# Allegro board ECG_v2.brd
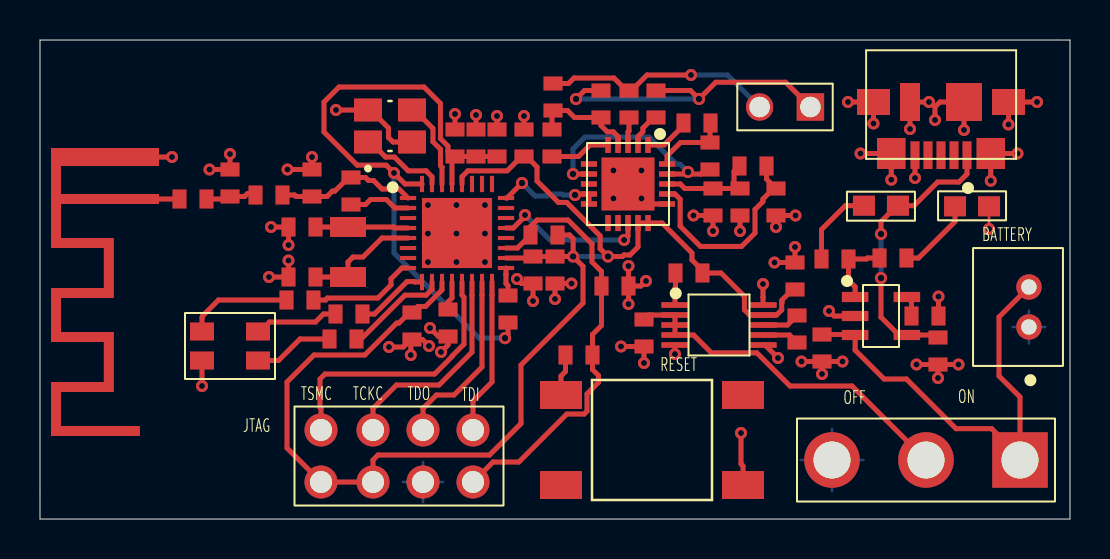
[diagram p0: board, top side]
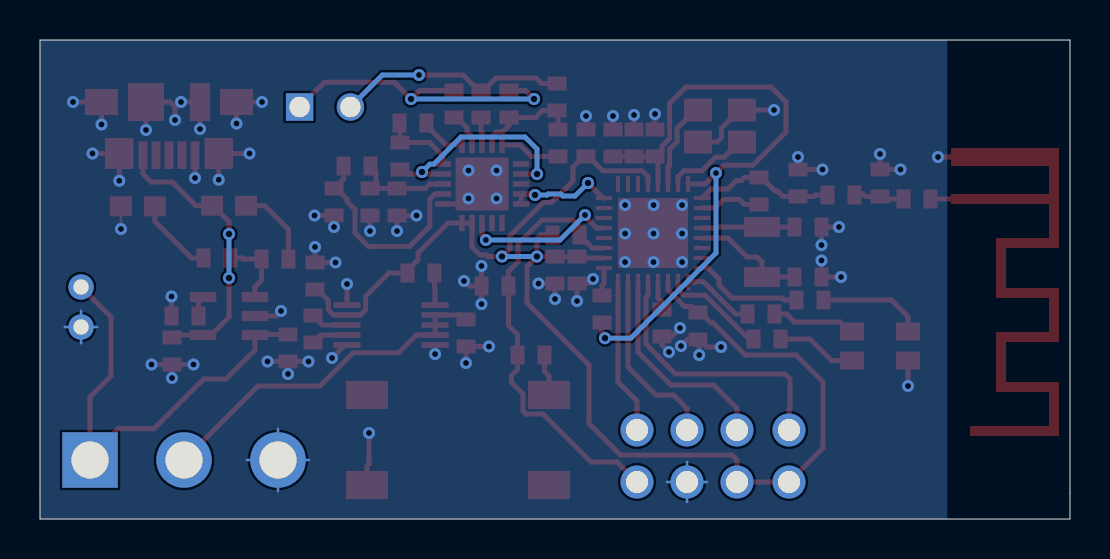
[diagram p1: board, bottom side, seen from below]

Outline 51.5 x 23.95 mm; copper layers: TOP, BOTTOM. Coordinates in mm from the lower left corner of the outline.
Outline path: 0,23.95 51.5,23.95 51.5,0 0,0 0,23.95

## Design rules (mm)
constraint set DEFAULT: min track width 0.127

## Placement (name value [footprint] x y rotation side)
A1  ANTENNA  [AN043_PATCH_ANTENNA]  5.45 19.05 90 top
C1  100nF  [0603_C]  28.75 11.65 0 top
C2  12 pF  [0603_C]  13.1 14.6 0 top
C3  12 pF  [0603_C]  13.1 12.1 0 top
C4  12 pF  [0603_C]  7.65 16 0 top
C5  1.2 pF  [0603_C]  13.6 16.8 270 top
C6  1.2 pF  [0603_C]  9.5 16.8 270 top
C7  1 uF  [0603_C]  20.4 9.8 90 top
C8  100 nF  [0603_C]  18.6 9.65 90 top
C9  100 nF  [0603_C]  24.2 18.8 270 top
C10  10 uF  [0603_C]  24.65 12.45 90 top
C11  100 nF  [0603_C]  25.75 12.45 90 top
C12  10 uF  [0603_C]  21.8 18.8 270 top
C13  100 nF  [0603_C]  22.85 18.8 270 top
C14  100 nF  [0603_C]  20.75 18.8 270 top
C15  0.33 uF  [0603_C]  37.85 9.5 90 top
C16  10uF  [0603_C]  37.75 12.15 90 top
C17  10 uF  [0603_C]  30.2 9.3 90 top
C18  4.7uF  [0603_C]  44.9 8.4 90 top
C19  4.7uF  [0603_C]  39.1 8.55 90 top
C20  0.22uF  [0603_C]  32.85 19.8 180 top
C21  1nF  [0603_C]  25.6 18.8 90 top
C22  0.1uF  [0603_C]  36.8 15.85 270 top
C23  0.1uF  [0603_C]  33.65 15.85 270 top
CN1  3-644456-2  [TE_3-644456-2]  38.52 20.6 180 top
CN2  B2B-PH-K-S  [CONN2]  49.45 9.6 270 top
D1  RGB  [RGB_LED]  9.5 8.65 0 top
D2  LTST-S270KGKT  [LED_SMD]  46.6 15.63 180 top
D3  LTST-S270KGKT  [LED_SMD]  42.05 15.67 0 top
J1  4X2  [HEADER4X2]  17.95 3.15 180 top
J2  47346-0001  [MICRO_USB]  45.05 20.85 180 top
L1  15 nH  [0603_L]  15.55 16.4 90 top
L2  2 nH  [0603_L]  11.45 16.2 180 top
L3  10 uH  [0603_L]  23.4 10.5 270 top
R1  100  [0603_R]  15.15 9 180 top
R2  100  [0603_R]  15.45 10.25 180 top
R3  270  [0603_R]  13 10.95 180 top
R4  10k  [0603_R]  25.2 14.2 180 top
R5  330  [0603_R]  26.95 8.2 180 top
R6  100 k  [0603_R]  32.45 12.3 180 top
R7  8.2k  [0603_R]  44.25 10.15 180 top
R8  150  [0603_R]  39.75 13 180 top
R9  150  [0603_R]  42.65 13.05 180 top
R10  180k  [0603_R]  30.8 20.75 90 top
R11  10M  [0603_R]  33.5 18.15 270 top
R12  180k  [0603_R]  29.45 20.75 270 top
R13  10M  [0603_R]  28.05 20.75 270 top
R14  10M  [0603_R]  25.65 21.1 270 top
R15  10M  [0603_R]  35.65 17.65 180 top
R16  10M  [0603_R]  35 15.85 270 top
S1  SPDT  [SPDT_SW]  44.3 2.95 180 top
S2  FSM2JSMA  [BUTTON_SMD]  30.6 3.95 0 top
U1  CC2640R2LRHBR  [CC2640]  20.85 14.3 0 top
U2  MAX1759EUB  [MAX1759]  33.95 9.7 0 top
U3  -  [MCP73831]  42.05 10.15 0 top
U4  -  [AD8232]  29.4 16.75 0 top
Y1  TSX-3225_240000MF20X-AC0  [XTAL_24MHZ]  17.5 19.65 90 top
Y2  FC-135R_327680KA-AG0  [XTAL_32_768KHZ]  15.4 13.35 270 top

## Library data of the parts
A1 = ANTENNA_1
C1 C15-C23 = C
C2-C14 = Capacitor
CN1 CN2 = 3-644456-2
D1 = XZM2CRKM2DGFBB45SCCB
D2 D3 = LTST-S270KGKT
J1 = 5X5
J2 = 47346-0001
L1-L3 = Inductor
R1-R16 = R
S1 = 500SSP1S1M2REA
S2 = 2-1437565-7
U1 = CC2640R2LRHBR
U2 = MAX1759EUB
U3 = MCP73831T-2ACIOT
U4 = AD8232ACPZ-WP: User Part Number: PN
Y1 = TSX-3225_240000MF20X-AC0
Y2 = FC-135R_327680KA-AG0

## Footprints (pads in the part's own frame, mm; a bottom-side part is the same pattern mirrored in y, then rotated)
0603_C
  rect 0.7x0.95 smd: 1(-0.675,0) 2(0.675,0)
0603_L
  rect 0.7x0.95 smd: 1(-0.675,0) 2(0.675,0)
0603_R
  rect 0.7x0.95 smd: 1(-0.675,0) 2(0.675,0)
AD8232
  rect 0.275x0.805 smd: 1(1,1.952) 2(0.5,1.952) 3(0,1.952) 4(-0.5,1.952) 5(-1,1.952) 11(-1,-1.952) 12(-0.5,-1.952) 13(0,-1.952) 14(0.5,-1.952) 15(1,-1.952)
  rect 0.805x0.275 smd: 6(-1.952,1) 7(-1.952,0.5) 8(-1.952,0) 9(-1.952,-0.5) 10(-1.952,-1) 16(1.952,-1) 17(1.952,-0.5) 18(1.952,0) 19(1.952,0.5) 20(1.952,1)
  rect 2.65x2.65 smd: HTAB(0,0)
AN043_PATCH_ANTENNA
  rect 0.9x0.5 smd: 1(-0.95,-0.25)
  rect 0.5x0.5 smd: 2(-3.05,-0.25)
BUTTON_SMD
  rect 2.1x1.4 smd: 1(-4.55,2.25) 2(4.55,2.25) 3(-4.55,-2.25) 4(4.55,-2.25)
CC2640
  rect 0.813x0.203 smd: 1(-2.451,1.75) 2(-2.451,1.25) 3(-2.451,0.75) 4(-2.451,0.25) 5(-2.451,-0.25) 6(-2.451,-0.75) 7(-2.451,-1.25) 8(-2.451,-1.75) 17(2.451,-1.75) 18(2.451,-1.25) 19(2.451,-0.75) 20(2.451,-0.25) 21(2.451,0.25) 22(2.451,0.75) 23(2.451,1.25) 24(2.451,1.75)
  rect 0.203x0.813 smd: 9(-1.75,-2.451) 10(-1.25,-2.451) 11(-0.75,-2.451) 12(-0.25,-2.451) 13(0.25,-2.451) 14(0.75,-2.451) 15(1.25,-2.451) 16(1.75,-2.451) 25(1.75,2.451) 26(1.25,2.451) 27(0.75,2.451) 28(0.25,2.451) 29(-0.25,2.451) 30(-0.75,2.451) 31(-1.25,2.451) 32(-1.75,2.451)
  rect 3.505x3.505 smd: 33(0,0)
CONN2
  round 1.27 hole 0.762: 1(0,0) 2(-2,0)
HEADER4X2
  round 1.65 hole 1.1: 1(-3.7,-1.3) 2(-3.7,1.3) 3(-1.2,-1.3) 4(-1.2,1.3) 5(1.3,-1.3) 6(1.3,1.3) 7(3.9,-1.3) 8(3.9,1.3)
LED_SMD
  rect 1.1x1 smd: 1(-0.85,0) 2(0.85,0)
MAX1759
  rect 1.359x0.279 smd: 1(-2.203,1) 2(-2.203,0.5) 3(-2.203,0) 4(-2.203,-0.5) 5(-2.203,-1) 6(2.203,-1) 7(2.203,-0.5) 8(2.203,0) 9(2.203,0.5) 10(2.203,1)
MCP73831
  rect 1.321x0.508 smd: 1(-1.295,0.95) 2(-1.295,0) 3(-1.295,-0.95) 4(1.295,-0.95) 5(1.295,0.95)
MICRO_USB
  rect 0.45x1.38 smd: 1(-1.3,2.66) 2(-0.65,2.66) 3(0,2.66) 4(0.65,2.66) 5(1.3,2.66)
  rect 1.425x1.55 smd: S1(-2.487,2.575) S2(2.487,2.575)
  rect 1.65x1.3 smd: S3(-3.375,0) S6(3.375,0)
  rect 1.8x1.9 smd: S4(-1.15,0)
  rect 1x1.9 smd: S5(1.55,0)
RGB_LED
  rect 1.2x0.9 smd: 1(-1.4,0.725) 2(1.4,0.725) 3(1.4,-0.725) 4(-1.4,-0.725)
SPDT_SW
  rect 2.775x2.775 hole 1.85: 1(-4.7,0)
  round 2.775 hole 1.85: 2(0,0) 3(4.7,0)
TE_3-644456-2
  rect 1.37x1.37 hole 1.02: 1(0,0)
  round 1.37 hole 1.02: 2(2.54,0)
XTAL_24MHZ
  rect 1.15x1.4 smd: 1(-0.8,1.1) 2(-0.8,-1.1) 3(0.8,-1.1) 4(0.8,1.1)
XTAL_32_768KHZ
  rect 1x1.8 smd: 1(-1.25,0) 2(1.25,0)

## Nets
3.3V: C8.2(B) C9.2(B) C10.2(B) C11.2(B) C16.1 J1.6 J1.8 R4.1 R6.1 U1.11 U1.18 U1.28 U2.9 U4.14 U4.15
GND: A1.1(GND) C1.2 C2.1 C3.1 C5.1 C6.1 C7.1 C8.1 C9.1 C10.1 C11.1 C12.1 C13.1 C14.1 C16.2 C17.1 C18.1 C19.1 C22.2 C23.2 CN2.1 D1.4 D2.1(K2) J1.4 J2.5 J2.S1 J2.S2 J2.S3 J2.S4 J2.S5 J2.S6 R7.1 R16.2 S1.3(NO) S2.4 U1.33 U2.5 U2.6 U2.10 U3.2(VSS) U4.16 U4.HTAB Y1.2 Y1.4(GND#4)
VBAT: C19.2 CN2.2 S1.1 U3.3
VDDR: C12.2(B) C13.2(B) C14.2(B) L3.2(B) U1.29 U1.32
VIN: C17.2 S1.2 U2.2 U2.3 U2.4
DCDC_SW: L3.1 U1.17
DCOUPL: C7.2(B) U1.12
ECG: U1.24 U4.9 U4.10
IAOUT: R11.2 U4.7 U4.19
IN+: CN1.1 R10.2 R13.1
IN-: CN1.2 R12.1 R14.1
JTAG_TCKC: J1.5 U1.14
JTAG_TDI: J1.1 U1.16
JTAG_TDO: J1.3 U1.15
JTAG_TMSC: J1.7 U1.13
MCP_STAT: R8.1 R9.2 U3.1
RESET_N: C1.1 J1.2 R4.2 R5.1 U1.19
RF_N: L1.1 U1.2
RF_P: C5.2(B) L1.2(B) L2.1 U1.1
RGB_BLUE: R1.1 U1.10
RGB_GREEN: R2.1 U1.9
RGB_RED: R3.1 U1.8
SDN: U1.21 U4.13
VUSB: C18.2 D3.2 J2.1(VBUS) U3.4
X24_N: U1.30 Y1.3
X24_P: U1.31 Y1.1
X32K_Q1: C2.2(B) U1.4 Y2.1
X32K_Q2: C3.2(B) U1.5(X32K_Q2) Y2.2
N71434: C4.2(B) C6.2(B) L2.2(B)
N75000: C15.2 U2.8
N75004: C15.1 U2.7
N75037: R6.2 U2.1(POK)
N76094: R7.2 U3.5
N78042: R10.1 U4.2
N78046: R12.2 U4.3
N78162: C21.2 R13.2 R14.2 U4.4
N78166: C21.1 U4.5
N78759: C20.2 U4.1
N78780: C20.1 R11.1 U4.20
N78887: C22.1 R15.1 U4.17(VS+)
N78958: C23.1 R15.2 R16.1 U4.18
N81014: D1.1(R_A) R3.2
N81018: D1.2 R2.2
N81022: D1.3 R1.2
N81339: R5.2 S2.1
N96065: D3.1(K2) R8.2
N129274: A1.2 C4.1
N774501: D2.2 R9.1

Pads without a net: J2 2 3 4; S2 2 3; U1 3 6 7 20 22 23 25 26 27; U4 6 8 11 12

## Via types
v1: diameter 0.6, hole 0.3, TOP to BOTTOM, 79 vias
v2: diameter 0.61, hole 0.33, TOP to BOTTOM, 11 vias

## Routing (per net, layer and track width the routed paths; a pad name or vN(x,y) marks a point on that pad's centre or on a via; arc(x,y) is an arc through that point)
3.3V: length 69.4
  TOP w0.25: C16.1 37.62,11.47 37.1,10.95 37.1,10.82 37.08,10.81 37.08,10.46 36.83,10.2 U2.9 35.48,10.2 35.22,10.46 35.22,11.13 34.05,12.3 33.12,12.3 33.12,12.43 32.6,12.95 32.6,13.3 31.1,14.8 U4.15 U4.14 29.9,13.6 29.5,13.2 29.2,13.2 29.12,13.12 v2(28.4,13.12) 28.01,13.52 28.01,14.16 26.34,15.83 25.92,15.83 24.85,16.9 24.85,17.6 24.32,18.12 C9.2 24.07,18.12 23.36,17.41 21.39,17.41 21.1,17.12 U1.28 ; v2(26.66,13.12) 27.15,12.63 27.15,10.8 24.05,7.7 24.05,4.77 22.48,3.2 16.9,3.2 16.65,2.95 J1.6 J1.8 12.35,3.55 12.35,6.85 13.7,8.2 16.24,8.2 17.84,9.8 17.95,9.8 18.48,10.32 C8.2 18.9,10.62 19.27,10.62 20.1,11.45 U1.11 ; v2(26.66,13.12) C11.2 C10.2 24.57,13.05 U1.18 ; v2(26.66,13.12) 26.66,14.02 26.48,14.2 R4.1
  BOTTOM w0.25: v2(26.66,13.12) v2(28.4,13.12)
GND: length 82.7
  TOP w0.127: D2.1 v1(47.45,14.5)
  TOP w0.25: C1.2 v1(29.43,10.75) ; C1.2 30.05,11.65 v1(30.3,11.9) ; C1.2 v1(29.43,12.65) ; v1(37.75,13.6) C16.2 v1(36.73,12.82) ; v1(47.54,16.91) 47.54,18.27 v1(48.88,18.27) ; J2.5 v1(43.75,17.05) ; v1(25.75,11) C11.1 v1(26.57,11.78) ; 18.6,8.97 18.54,8.97 18.16,8.6 v1(17.45,8.6) ; 18.6,8.97 19.12,8.97 v1(19.45,8.65) ; 18.6,8.97 18.54,8.91 v1(18.54,8.2) ; v1(44.9,7.05) C18.1 ; C18.1 v1(43.83,7.72) ; C18.1 v1(45.92,7.72) ; v1(41.67,19.77) J2.S6 v1(40.4,20.85) ; v1(35.05,4.3) 35.05,2.75 35.15,2.65 S2.4 ; v1(20.05,8.35) 20.4,8.7 C7.1 19.93,9.12 v1(19.5,9.55) ; C13.1 v1(22.85,20.15) ; v1(33.65,14.4) C23.2 v1(32.67,15.18) ; U3.2 39.7,10.15 v1(39.45,10.4) ; U2.5 v1(31.75,8.25) ; v1(12.43,12.93) C3.1 v1(11.45,12.1) ; v1(42.56,16.96) 42.56,18.27 v1(41.03,18.27) ; v1(12.43,13.7) C2.1 v1(11.55,14.6) ; v1(44.45,20.85) J2.S5 v1(43.5,19.5) ; v1(49.85,20.85) J2.S3 v1(48.42,19.73) ; v1(36.9,8.05) 36.25,8.7 U2.6 ; v1(13.6,18.1) C5.1 v1(12.38,17.48) ; 8.1,7.92 v1(8.1,6.65) ; v1(39.1,7.25) C19.1 ; C19.1 v1(38.08,7.88) ; C19.1 v1(40.12,7.88) ; v1(37.77,15.18) C22.2 v1(36.8,14.6) ; v1(46.2,19.45) J2.S4 45,20.85 44.75,20.6 v1(44.75,19.95) ; R7.1 v1(44.92,11.12) ; U2.10 36.15,11.09 36.15,11.1 v1(36.15,11.75) ; v1(8.48,17.48) C6.1 v1(9.5,18.25) ; v1(30.07,16.03) 30.35,15.75 U4.16 ; v1(29.05,8.62) C17.1 v1(30.2,7.8) ; C14.1 v1(20.75,20.25) ; v1(23.85,12) 24.07,11.78 C10.1 v1(24.65,10.9) ; A1.1 v1(6.6,18.1) ; R16.2 v1(35,14.4) ; v1(14.8,20.45) Y1.4 16.52,20.45 17.42,19.55 17.42,19.07 17.65,18.85 Y1.2 ; C9.1 v1(24.2,20.15) ; C12.1 v1(21.8,20.2)
  BOTTOM w0.127: 48.63,9.6 CN2.1 ; CN2.1 49.45,8.79 ; CN2.1 49.45,10.41 ; CN2.1 50.26,9.6 ; J1.4 19.15,2.85 ; J1.4 19.15,0.85 ; J1.4 20.15,1.85 ; J1.4 18.15,1.85 ; S1.3 41.17,2.95 ; S1.3 39.6,4.52 ; S1.3 39.6,1.38 ; S1.3 38.03,2.95
  vias: v1(19.4,15.7) v1(19.4,14.27) v1(19.4,12.85) v1(20.82,15.7) v1(20.82,14.27) v1(20.82,12.85) v1(22.25,15.7) v1(22.25,14.27) v1(22.25,12.85) v1(28.67,17.43) v1(28.67,16.03) v1(30.07,17.43)
VBAT: length 22.6
  TOP w0.25: C19.2 40.73,9.22 U3.3 40.75,8.45 42.2,7 43.32,7 45.8,4.52 47.58,4.52 49,3.1 ; 49,3.1 49,6.1 47.95,7.15 47.95,10.1 CN2.2 ; 49,3.1 S1.1
VDDR: length 32.7
  TOP w0.25: U1.32 18.25,16.75 v1(17.7,17.3) 17.31,17.69 15.86,17.69 14.2,19.35 14.2,20.85 14.95,21.6 19.2,21.6 20.02,20.78 20.02,19.02 20.4,18.64 20.4,18.35 20.62,18.12 C14.2 ; C14.2 20.6,17.98 U1.29 ; C14.2 C12.2 C13.2 ; L3.2 23.4,9.25 23.25,9.1 v2(23.25,9.04)
  BOTTOM w0.25: v1(17.7,17.3) 17.7,13.3 21.96,9.04 v2(23.25,9.04)
VIN: length 17.8
  TOP w0.25: C17.2 30.43,10.2 U2.2 U2.3 U2.4 32.68,9.2 33.57,8.31 35.84,8.31 37.5,6.65 40.6,6.65 S1.2
DCDC_SW: length 1.4
  TOP w0.25: U1.17 23.3,12.23 23.3,12.23 23.3,11.77 23.4,11.67 L3.1
DCOUPL: length 1.5
  TOP w0.25: C7.2 20.39,10.49 20.39,10.84 20.6,11.05 U1.12
ECG: length 5.3
  TOP w0.25: U4.10 U4.9 26.8,16.25 v2(26.75,16.2) ; U1.24 23.35,16.05 v2(24.1,16.8)
  BOTTOM w0.25: v2(26.75,16.2) 26.14,16.2 26.09,16.25 25.46,16.25 25.36,16.15 24.75,16.15 v2(24.1,16.8)
IAOUT: length 11.1
  TOP w0.25: R11.2 33.27,17.48 33.05,17.25 32.5,17.25 v2(32.4,17.35) 32.3,17.25 U4.19 ; U4.7 v2(26.65,17.25)
  BOTTOM w0.25: v2(32.4,17.35) 32.01,17.74 31.81,17.74 30.45,19.1 27.25,19.1 26.65,18.5 v2(26.65,17.25)
IN+: length 16.3
  TOP w0.25: CN1.1 37.28,21.84 33.79,21.84 v2(32.95,21) 32.52,21.43 R10.2 ; v2(26.8,21) 27.23,21.43 R13.1
  BOTTOM w0.254: v2(26.8,21) v2(32.95,21)
IN-: length 11.7
  TOP w0.25: v1(32.55,22.2) 30.35,22.2 29.58,21.43 R12.1 29.33,21.43 28.7,22.05 26.7,22.05 26.43,21.77 R14.1
  BOTTOM w0.25: v1(32.55,22.2) 34.38,22.2 CN1.2
JTAG_TCKC: length 10.7
  TOP w0.25: J1.5 16.65,5.53 17.82,6.7 19.95,6.7 21.6,8.35 21.6,11.19 U1.14
JTAG_TDI: length 7.8
  TOP w0.25: U1.16 22.6,11.19 22.6,6.85 21.65,5.9 J1.1
JTAG_TDO: length 9.1
  TOP w0.25: J1.3 19.15,5.53 19.82,6.2 20.7,6.2 22.1,7.6 22.1,11.19 U1.15
JTAG_TMSC: length 13.7
  TOP w0.25: U1.13 21.1,11.19 21.2,11.09 21.2,8.74 20.6,8.15 20.6,8.12 19.73,7.25 14.25,7.25 14,7 14,5.58 14.05,5.53 J1.7
MCP_STAT: length 3.6
  TOP w0.25: R9.2 41.37,13.05 41.32,13 R8.1 40.42,11.94 40.75,11.61 U3.1
RESET_N: length 21.9
  TOP w0.25: U1.19 23.87,13.55 R4.2 24.53,14.62 24.85,14.95 26.4,14.95 27.6,13.75 27.6,12.85 28.08,12.38 C1.1 28.08,9.68 27.62,9.23 R5.1 27.62,7.47 27.93,7.17 27.93,6.83 27.35,6.26 27.35,5.4 27.2,5.25 26.34,5.25 23.94,2.85 22.65,2.85 J1.2
RF_N: length 3.1
  TOP w0.25: 15.55,15.72 16.28,15.72 16.53,15.97 17.32,15.97 17.74,15.55 U1.2
RF_P: length 7.1
  TOP w0.25: U1.1 17.95,16.5 17.1,16.5 16.68,16.93 16.43,16.93 16.28,17.07 L1.2 15.4,16.93 15.28,16.93 14.75,16.4 14.62,16.4 14.35,16.12 C5.2 12.8,16.12 12.73,16.2 12.12,16.2
RGB_BLUE: length 5.2
  TOP w0.25: R1.1 16.06,9 18.25,11.19 19.31,11.19 19.6,11.48 U1.10
RGB_GREEN: length 3.7
  TOP w0.25: U1.9 18.75,11.85 18.72,11.87 18.35,11.87 16.73,10.25 R2.1
RGB_RED: length 5.6
  TOP w0.25: U1.8 18.09,12.55 17.55,12.01 17.55,11.7 16.9,11.05 14.38,11.05 14.28,10.95 R3.1
SDN: length 7.7
  TOP w0.25: v1(29.21,13.95) 29.4,14.14 U4.13 ; U1.21 23.67,14.55 24.25,15.13 v1(24.25,15.2)
  BOTTOM w0.25: v1(24.25,15.2) 25.5,13.95 v1(29.21,13.95)
VUSB: length 14.3
  TOP w0.25: v2(42.05,12.05) 42.05,10.09 42.94,9.2 U3.4 44.78,9.2 C18.2 ; J2.1 46.35,17.25 45.95,16.85 44.88,16.85 43.7,15.67 D3.2 42.85,15.67 42.05,14.87 v2(42.05,14.25)
  BOTTOM w0.25: v2(42.05,12.05) v2(42.05,14.25)
X24_N: length 4.4
  TOP w0.25: U1.30 20.1,17.59 20.02,17.67 20.02,18.49 19.65,18.86 19.65,19.53 18.72,20.45 Y1.3
X24_P: length 4.3
  TOP w0.25: U1.31 19.6,17.12 19.31,17.41 18.41,17.41 17.72,18.1 17.28,18.1 16.52,18.85 Y1.1
X32K_Q1: length 4.6
  TOP w0.25: C2.2 Y2.1 17.69,14.6 17.74,14.55 U1.4
X32K_Q2: length 5.9
  TOP w0.25: C3.2 Y2.2 15.4,12.85 15.65,13.1 16.15,13.1 17.1,14.05 U1.5
N71434: length 2.6
  TOP w0.25: C4.2 9.38,16 C6.2 10.23,16.12 10.36,16.26 10.72,16.26 L2.2
N75000: length 1.9
  TOP w0.25: U2.8 37.38,9.7 C15.2
N75004: length 1.9
  TOP w0.25: C15.1 37.48,9.2 U2.7
N75037: length 1.6
  TOP w0.25: R6.2 31.77,11.57 31.75,11.54 U2.1
N76094: length 1
  TOP w0.25: R7.2 43.58,10.87 U3.5
N78042: length 1.8
  TOP w0.25: R10.1 30.68,20.07 30.15,19.55 30.15,19.37 29.9,19.12 U4.2
N78046: length 1.4
  TOP w0.25: U4.3 29.4,19.36 29.45,19.41 R12.2
N78162: length 5.4
  TOP w0.25: C21.2 25.6,20.38 R14.2 26.38,20.43 26.73,20.07 R13.2 28.05,19.67 28.37,19.36 28.67,19.36 28.92,19.11 28.92,18.72 U4.4
N78166: length 3
  TOP w0.25: U4.5 27.5,18.7 26.93,18.12 C21.1
N78759: length 2.3
  TOP w0.25: C20.2 32.17,19.68 31.2,18.7 U4.1
N78780: length 3.8
  TOP w0.25: 33.52,19.8 33.5,19.77 33.5,18.82 32.02,18.82 31.35,18.15 U4.20
N78887: length 10.6
  TOP w0.25: U4.17 31.75,16.25 32.01,15.99 32.01,14.64 33.02,13.63 35.08,13.63 35.75,14.3 35.75,15.47 36.15,15.87 36.15,16 36.67,16.52 C22.1 36.33,17 R15.1
N78958: length 5.1
  TOP w0.25: 34.98,17.65 34.7,17.38 34.7,16.82 R16.1 C23.1 32.24,16.52 32.01,16.75 U4.18
N81014: length 5.3
  TOP w0.25: D1.1 8.1,10.08 8.13,10.11 8.13,10.15 8.93,10.95 R3.2
N81018: length 4.2
  TOP w0.25: R2.2 14.17,10.25 13.77,9.85 11.48,9.85 11,9.38 D1.2
N81022: length 4
  TOP w0.25: 14.48,9 13,9 11.93,7.92 10.9,7.92
N81339: length 2.1
  TOP w0.25: 26.28,8.2 26.28,7.38 26.05,7.15 S2.1
N96065: length 4.1
  TOP w0.25: D3.1 40.27,15.67 39.08,14.47 39.08,13
N129274: length 1.3
  TOP w0.25: A1.2 C4.1
N774501: length 3.9
  TOP w0.25: D2.2 45.75,14.88 43.93,13.05 43.33,13.05

## Copper pours and planes (outline as drawn; the poured copper is in the pictures)
GND on BOTTOM: 6.14,23.95 51.5,23.95 51.5,0 6.13,0 6.14,0.01
N129274 on TOP (solid shape): 5.45,17.65 1.05,17.65 1.05,16.25 5.45,16.25 5.45,15.75 1.05,15.75 1.05,14.05 3.69,14.05 3.69,11.05 1.05,11.05 1.05,9.35 3.69,9.35 3.69,6.35 1.05,6.35 1.05,4.65 4.99,4.65 4.99,4.15 0.55,4.15 0.55,6.85 3.19,6.85 3.19,8.85 0.55,8.85 0.55,11.55 3.19,11.55 3.19,13.55 0.55,13.55 0.55,18.55 5.45,18.55

## Text on the board
Ref Des/Silkscreen Top: JTAG | TSMC | TCKC | TDO | TDI | RESET | OFF | ON | BATTERY
